# Altium PCB RADIOMASTER.PcbDoc
Units mm, origin at the board's own origin, x right, y up, seen from the top; angles counter-clockwise.
Board outline 22.82 x 52.44 mm, 2 copper layers (Top Layer, Bottom Layer); 23 components, 30 nets, 87 pads, 18 vias.
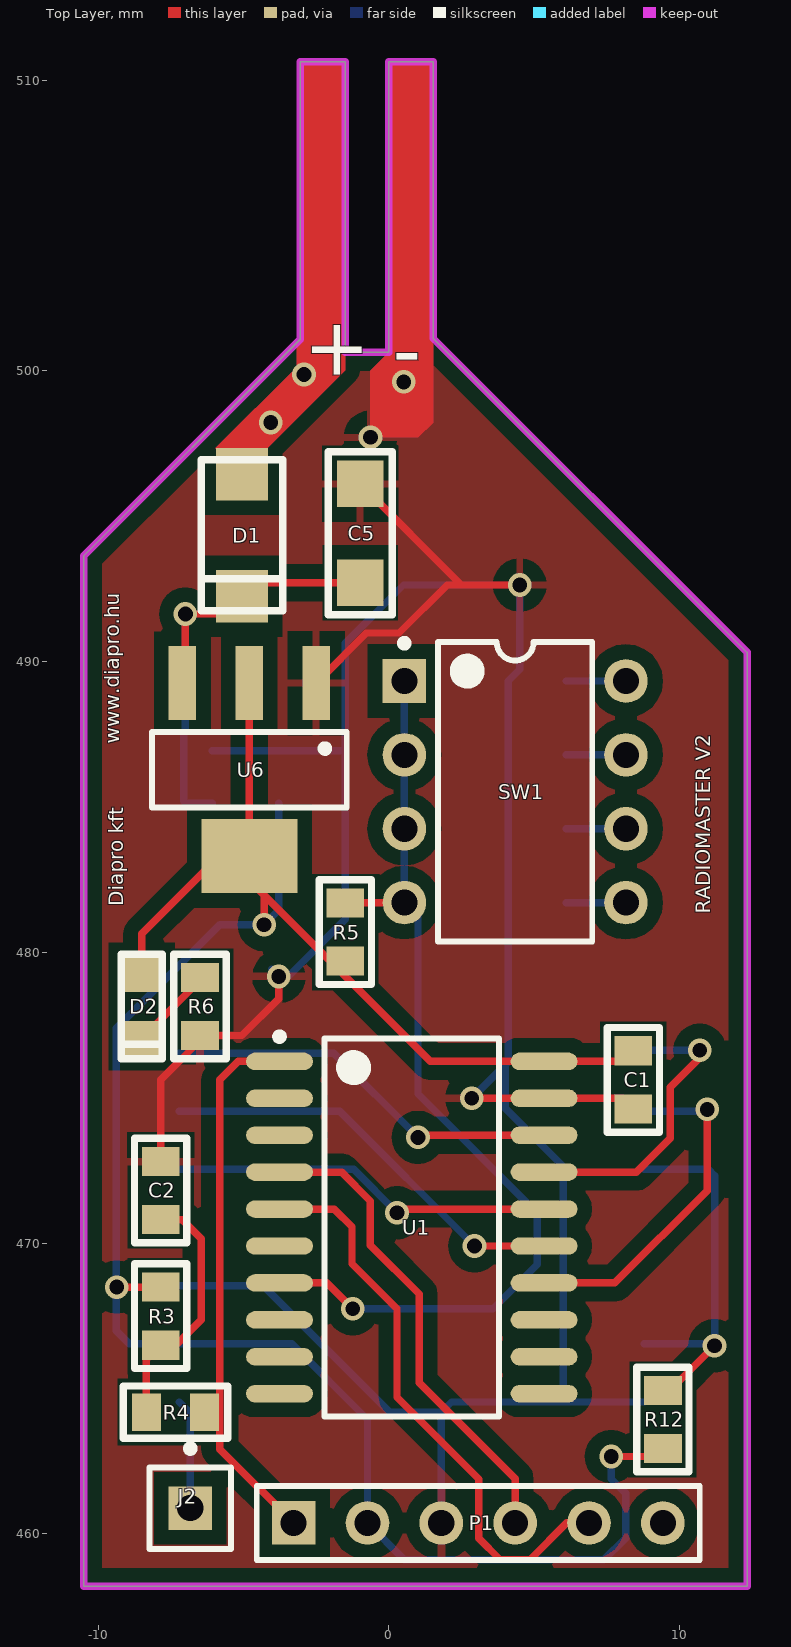
[diagram p0: Top Layer view]
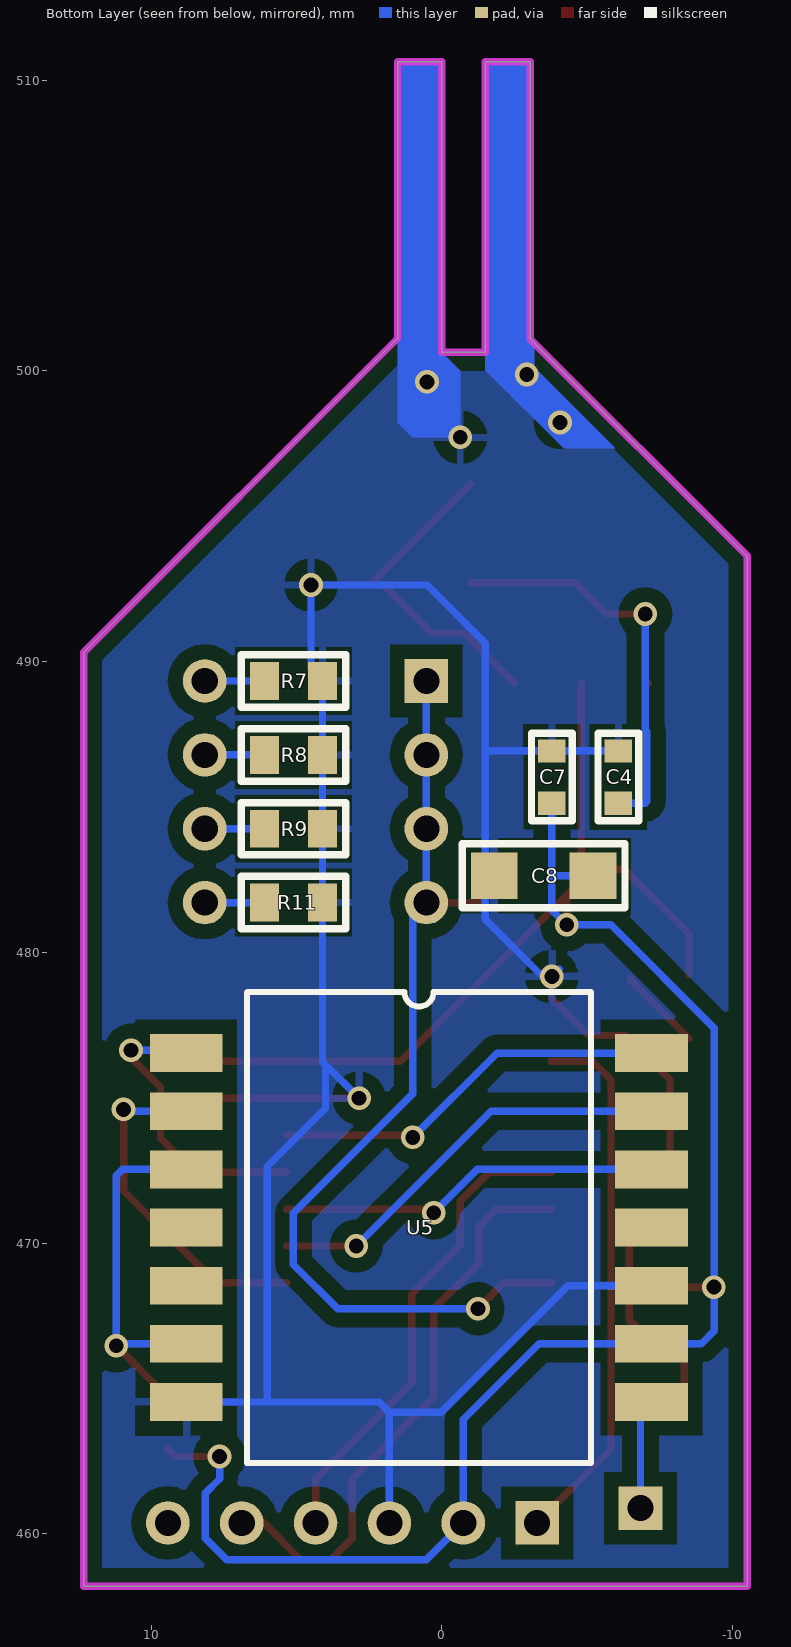
[diagram p1: Bottom Layer view, seen from below]
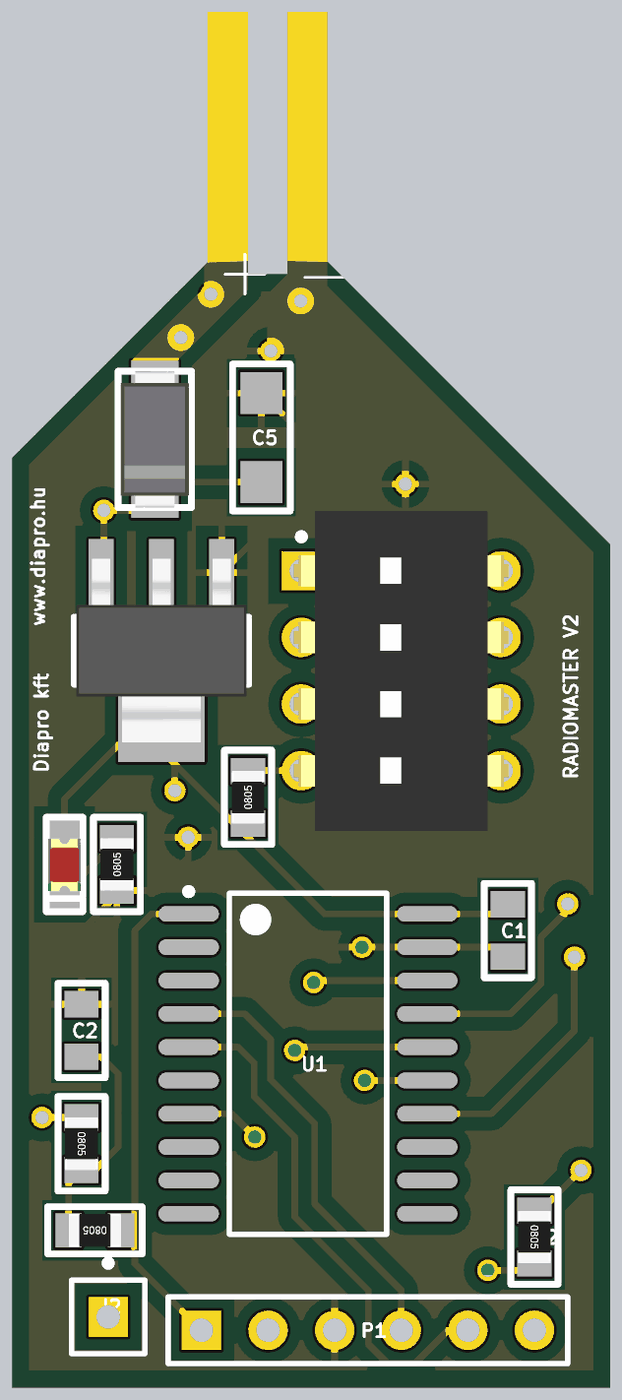
[diagram p2: 3D render of the assembled board from above, using the file's embedded part models]
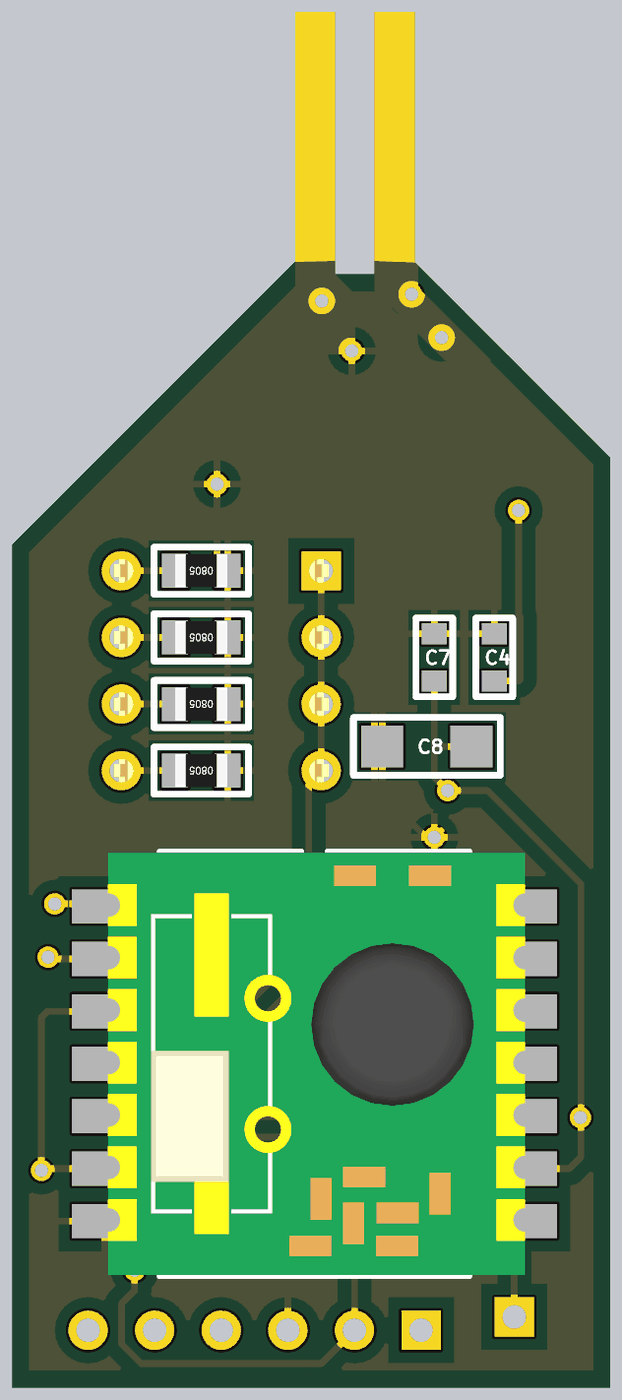
[diagram p3: 3D render of the assembled board from below, using the file's embedded part models]

## Layer stack, top to bottom
Top Layer: signal copper 0.0356
Dielectric: dielectric 0.32, FR-4, Dk 4.8
Bottom Layer: signal copper 0.0356

## Board outline
-10.5,458.192 -10.5,493.634 -3.048,501.086 -3.048,510.634 -1.5,510.634 -1.5,500.634 0,500.634 0,510.634 1.524,510.634 1.524,501.11 12.319,490.315 12.319,458.192

## Design rules (kind name [scope] priority, off if disabled: settings)
Clearance Clearance_to_polygon [All vs (InNamedPolygon('Bottom GND'))  or (InNamedPolygon('Top GND'))] p1: gap=0.508
Clearance [All] p2: gap=0.381
PolygonConnect [All] p1: connectstyle=Relief reliefconductorwidth=0.254 reliefentries=4 polygonreliefangle="90 Angle"
RoutingVias [All] p1: holewidth=0.508 width=0.813 viastyle="Through Hole" minholewidth=0.508 minwidth=0.813 maxholewidth=0.711 maxwidth=1.27
SilkToSilkClearance [All] p1: silktosilkclearance=0
SilkscreenOverComponentPads [All] p1: minsilkscreentomaskgap=0
SolderMaskExpansion [All] p1: expansion=0.102
Width [All] p1: maxlimit=1.524 minlimit=0.254 preferedwidth=0.254
26 further rules are at their usual default settings.

## Components (designator, comment, footprint, x,y, rotation, side; value= is the part's Value field where it differs from the comment)
C1 "100nF" FP_0805_CAP_060 8.406,475.614 r90 top
C2 "100nF" FP_0805_CAP_060 -7.85,471.804 r270 top
C4 "100nF" FP_0603_CAP_080 -6.072,486.028 r270 bottom
C5 "10uF" FP_1206_CAP_085 -0.992,494.41 r90 top
C7 "100nF" FP_0603_CAP_080 -3.786,486.028 r90 bottom
C8 "10uF" FP_1206_CAP_085 -3.5,482.634 r180 bottom
D1 "DIODE_big" "FP_SMA DO214AC" -5.056,496.442 r270 top
D2 "LED_RED" FP_0805_LED_RED -8.5,479.134 r270 top
J2 "ANT" PIN1 -6.834,460.882 r0 top
P1 "Header 6" HDR1X6 -3.278,460.374 r0 top
R3 "10K" FP_0805_RES -7.85,467.486 r270 top
R4 "100R" FP_0805_RES -7.342,464.184 r180 top
R5 "10k" FP_0805_RES -1.5,480.694 r90 top
R6 "270R" FP_0805_RES -6.5,478.134 r90 top
R7 "10k" FP_0805_RES 5.104,489.33 r0 bottom
R8 "10k" FP_0805_RES 5.104,486.79 r0 bottom
R9 "10k" FP_0805_RES 5.104,484.25 r0 bottom
R11 "10k" FP_0805_RES 5.104,481.71 r0 bottom
R12 "10k" FP_0805_RES 9.422,463.93 r270 top
SW1 "DIPSW4" "DIP switch 4 TH" 4.342,485.52 r0 top
U1 "PIC24F16KA101-I/SO" SOIC-SO20_N 0.786,470.534 r0 top
U5 "RFM12B" RFM12B-S1 0.786,470.534 r180 bottom
U6 "LD1117xx" SUPPLY_SOT223 -4.802,486.282 r270 top

## Footprints (in the part's own frame and the unit in brackets; to place one, negate y for a bottom-side part, rotate by r counter-clockwise, add the part's x,y. Pads: shape width x height; smd on the part's side, far side on the other; paste and mask are expansions set on the pad)
"DIP switch 4 TH" [mm]
  rect 1.5x1.5 hole 0.9: 1(-3.81,3.81)
  round 1.5 hole 0.9: 2(-3.81,1.27) 3(-3.81,-1.27) 4(-3.81,-3.81) 5(3.81,-3.81) 6(3.81,-1.27) 7(3.81,1.27) 8(3.81,3.81)
  silkscreen extent -3.93,-5.15 2.65,5.23, body extent -4.1,-6.1 4.1,6.1, height 5
FP_0603_CAP_080 [mm] "0.8mm magas 0603 kapacitás"
  rect 0.8x0.95 smd: 1(-0.9,0) 2(0.9,0)
  silkscreen extent -1.5,-0.7 1.5,0.7, body extent -0.8,-0.4 0.76,0.4, height 0.8
FP_0805_CAP_060 [mm] "0805 kapacitás YAGEO 0.6 mm magas"
  rect 1x1.3 smd: 1(-1,0) 2(1,0)
  silkscreen extent -1.8,-0.9 1.8,0.9, body extent -1,-0.64 1.03,0.64, height 0.6
FP_0805_LED_RED [mm] "0805 méretû piros LED"
  rect 1.2x1.3 smd: A(-0.1,0) K(2.1,0)
  silkscreen extent -0.8,-0.7 2.8,0.7, body extent 0.01,-0.63 2.03,0.62, height 1.1
FP_0805_RES [mm] "0805 ellenállás"
  rect 1x1.3 smd: 1(-1,0) 2(1,0)
  silkscreen extent -1.8,-0.9 1.8,0.9, body extent -1,-0.62 1,0.63, height 0.62
FP_1206_CAP_085 [mm] "1206 kapacitás 0.85 mm"
  rect 1.6x1.6 smd: 1(-1.7,0) 2(1.7,0)
  silkscreen extent -2.8,-1.1 2.8,1.1, body extent -1.52,-0.79 1.58,0.79, height 0.85
"FP_SMA DO214AC" [mm] "SMA DO-214AC tok"
  rect 1.8x1.8 smd: A(0,0) K(4.2,0)
  silkscreen extent -0.5,-1.4 4.7,1.4, body extent -0.5,-1.3 4.7,1.3, height 2.42
HDR1X6 [mm] "Connector; Header; 6 Position"
  rect 1.5x1.5 hole 0.9: 1(0,0)
  round 1.5 hole 0.9: 2(2.54,0) 3(5.08,0) 4(7.62,0) 5(10.16,0) 6(12.7,0)
  silkscreen extent -1.27,-1.27 13.97,1.27
PIN1 [mm] "Connector; Plug"
  rect 1.5x1.5 hole 0.9: 1(0,0)
  silkscreen extent -1.4,-1.4 1.4,2.17
RFM12B-S1 [mm]
  rect 2.5x1.3 smd: 1(-8,6) 2(-8,4) 3(-8,2) 4(-8,0) 5(-8,-2) 6(-8,-4) 7(-8,-6) 8(8,-6) 9(8,-4) 10(8,-2) 11(8,0) 12(8,2) 13(8,4) 14(8,6)
  silkscreen extent -5.91,-8.1 5.92,8.1, body extent -7.88,-8.05 8.04,8.05, height 2.1
SOIC-SO20_N [mm] "SOIC, 20-Leads, Body 12.8x7.5mm, Pitch 1.27mm, IPC Medium Density"
  oval 2.3x0.6 smd: 1(-4.55,5.715) 2(-4.55,4.445) 3(-4.55,3.175) 4(-4.55,1.905) 5(-4.55,0.635) 6(-4.55,-0.635) 7(-4.55,-1.905) 8(-4.55,-3.175) 9(-4.55,-4.445) 10(-4.55,-5.715) 11(4.55,-5.715) 12(4.55,-4.445) 13(4.55,-3.175) 14(4.55,-1.905) 15(4.55,-0.635) 16(4.55,0.635) 17(4.55,1.905) 18(4.55,3.175) 19(4.55,4.445) 20(4.55,5.715)
  silkscreen extent -4.67,-6.5 3,6.69, body extent -3.75,-6.5 3.75,6.5, height 2.65
SUPPLY_SOT223 [mm] "SOT223 package, 3 leads"
  rect 2.55x0.95 smd: 1(-2.975,2.3) 2(-2.975,0) 3(-2.975,-2.3)
  rect 2.55x3.3 smd: 2(2.975,0)
  silkscreen extent -1.3,-3.35 1.3,3.35, body extent -3.5,-3.25 3.5,3.25, height 1.65

## Part data
C1 C2 C4 C5 C7 C8: library part Cap, "Capacitor"
D2: library part LED_R, "Typical LED"
J2: library part Socket, "Socket"
P1: "Header, 6-Pin"
R3 R4 R5 R6 R7 R8 R9 R11 R12: library part Res3, "Resistor"
U1: "16-Bit Flash Microcontroller with nanoWatt XLP Technology, 16KB Flash, 1.5KB SRAM, 20-Pin SOIC, Industrial Temperature"
U5: "FM Module"
U6: "LD1117xx 3,3V lin reg"

## Via types
v1: diameter 0.813, hole 0.508, Top Layer to Bottom Layer, 18 vias

## Nets (pads, with @x,y where several pads share a name; then routed paths per layer and width w, separated by ;. In a path a pad name is that pad's centre, name@x,y a point inside that pad or via, vN(x,y) a via of type N, cw(c..) or ccw(c..) an arc to the next point about the centre after c; other vN are vias at no path point)
+++: D1.A
  other v1: -4.064,498.221 -2.921,499.872
---: C1.1 C2.1 C4.1 C5.2 C7.2 C8.1 P1.3 R6.1 R7.1 R8.1 R9.1 R11.1 U1.19 U5.7 U5.10 U6.1 | length 106.7
  Top Layer w0.254: C2.1 -7.85,475.614 -6.326,477.138 -5.056,477.138 -3.786,478.408 v1(-3.786,479.17) ; U6.1 -0.777,490.982 0.348,490.982 2,492.634 v1(4.5,492.634) 2.484,492.634 C5.2 ; v1(2.845,474.979) U1.19 8.041,474.979 C1.1
  Bottom Layer w0.254: U5.10 -4.326,468.534 0.024,464.184 1.802,464.184 ; C4.1 C7.2 -1.5,486.928 ; v1@-4.04,479.424 v1(-3.786,479.17) -3.464,479.17 -1.5,481.134 -1.5,490.634 0.5,492.634 v1(4.5,492.634) 4.5,489.726 R7.1 R8.1 R9.1 R11.1 4.104,476.238 4,476.134 ; P1.3 1.802,464.184 ; v1(2.845,474.979) 4,476.134 ; U5.7 6,464.534 ; 1.802,464.184 2.152,464.534 6,464.534 ; 4,476.134 4,474.634 6,472.634 6,464.534
  other v1: -0.635,497.713 0.508,499.618
AN0: U1.2
AN1: U1.3
AN2: R5.2 SW1.1 SW1.2 SW1.3 SW1.4 U1.7 | length 33.8
  Top Layer w0.254: U1.7 -2.135,468.629 v1(-1.246,467.74) ; R5.2@-1.484,481.71 SW1.4
  Bottom Layer w0.254: v1(-1.246,467.74) 3.58,467.74 5.104,469.264 5.104,471.03 1,475.134 1,481.242 SW1.4 SW1.3 SW1.2 SW1.1
AN2/PGD1: P1.4 U1.4 | length 16.7
  Top Layer w0.254: U1.4 -1.627,472.439 -0.636,471.448 -0.636,469.924 1.04,468.248 1.04,465.2 4.342,461.898 P1.4
GPIO0: U1.11
GPIO1: U1.9
GPIO2: U1.10
GPIO3: U1.6
GPIO4/PGC1: P1.5 U1.5 | length 19.9
  Top Layer w0.254: U1.5 -1.881,471.169 -1.271,470.559 -1.271,469.289 0.278,467.74 0.278,464.692 3.084,461.886 3.084,459.853 3.821,459.116 4.863,459.116 6.121,460.374 P1.5
GPIO5: U1.8
M\C\L\R\: P1.1 R4.1 U1.1 | length 18.6
  Top Layer w0.254: U1.1 -5.183,476.249 -5.818,475.614 -5.818,462.914 P1.1
MISO: U1.17 U5.1 | length 10.2
  Top Layer w0.254: U1.17 8.508,472.439 9.676,473.607 9.676,475.36 10.692,476.376 v1(10.692,476.63)
  Bottom Layer w0.254: U5.1 8.882,476.63 v1(10.692,476.63)
MOSI: U1.16 U5.12 | length 13.2
  Top Layer w0.254: v1(0.278,471.042) 0.405,471.169 U1.16
  Bottom Layer w0.254: U5.12 -1.214,472.534 v1(0.278,471.042)
NetC2_2: C2.2 R3.2 R4.2 | length 8.7
  Top Layer w0.254: R4.2 -8.342,465.994 R3.2 -7.326,466.486 -6.453,467.359 -6.453,470.153 -7.104,470.804 C2.2
NetD2_K: D2.K R6.2 | length 2.9
  Top Layer w0.254: D2.K -6.5,479.034 R6.2
NetJ2_1: J2.1 U5.8 | length 3.8
  Bottom Layer w0.254: U5.8 -6.834,464.154 J2.1
NetR7_2: R7.2 SW1.8 | length 2
  Bottom Layer w0.254: R7.2 SW1.8
NetR8_2: R8.2 SW1.7 | length 2
  Bottom Layer w0.254: R8.2 SW1.7
NetR9_2: R9.2 SW1.6 | length 2
  Bottom Layer w0.254: R9.2 SW1.6
NetR11_2: R11.2 SW1.5 | length 2
  Bottom Layer w0.254: R11.2 SW1.5
NetR12_1: R12.1 U5.3 U5.6 | length 13.2
  Top Layer w0.254: R12.1 9.66,464.93 v1(11.2,466.47)
  Bottom Layer w0.254: U5.6 11.136,466.534 v1(11.2,466.47) 11.2,472.312 10.978,472.534 U5.3
"RF I\R\Q\": U1.14 U5.2 | length 11.9
  Top Layer w0.254: U1.14 7.771,468.629 10.946,471.804 v1(10.946,474.598)
  Bottom Layer w0.254: U5.2 10.882,474.534 v1(10.946,474.598)
"RF S\S\": U1.18 U5.14 | length 13.8
  Top Layer w0.254: v1(1,473.634) 1.075,473.709 U1.18
  Bottom Layer w0.254: U5.14 -1.9,476.534 v1(1,473.634)
SCK: U1.15 U5.13 | length 14.5
  Top Layer w0.254: v1(2.945,469.899) U1.15
  Bottom Layer w0.254: U5.13 -1.69,474.534 v1(2.945,469.899)
SCL: U1.12
SDA: U1.13
VCC3.3V: C1.2 C7.1 C8.2 D2.A P1.2 R3.1 R5.1 R12.2 U1.20 U5.9 U6.2 | length 82.5
  Top Layer w0.254: v1(-9.358,468.486) R3.1 R3.1@-7.596,468.486 ; D2.A -8.5,480.634 -6.28,482.854 U6.2@-5.842,482.854 ; U6.2@-4.802,482.472 U6.2@-4.802,483.307 ; U6.2@-4.802,489.257 U6.2@-4.802,483.307 ; v1(-4.294,480.948) -4.294,481.964 ; v1(7.644,462.66) 9.152,462.66 R12.2 ; C1.2 8.041,476.249 U1.20 1.421,476.249 -5.219,482.889 U6.2@-4.802,483.307
  Bottom Layer w0.254: C8.2 -3.786,482.634 ; C7.1 -3.786,482.634 ; v1(7.644,462.66) 7.644,461.887 8.14,461.391 8.14,459.853 7.391,459.104 0.532,459.104 P1.2 -0.738,463.93 -3.342,466.534 U5.9 -8.93,466.534 -9.374,466.978 -9.374,477.392 -5.818,480.948 v1(-4.294,480.948) -3.786,481.456 -3.786,482.634
VCC_13V: C4.2 C5.1 D1.K U6.3 | length 16.3
  Top Layer w0.254: U6.3 -7,489.359 v1(-7,491.634) -5.664,491.634 D1.K -4.588,492.71 C5.1
  Bottom Layer w0.254: v1(-7,491.634) -7,487.648 -7.055,487.593 -7.055,485.189 -6.994,485.128 C4.2
pads on no net: P1.6 U5.4 U5.5 U5.11

## Polygon pours and split planes (outlines as drawn)
--- on Top Layer "Top GND" (solid, pour order 4): -10.5,458.216 12.319,458.216 12.319,490.315 2.076,500.558 2,500.634 -3.5,500.634 -10.485,493.649
--- on Bottom Layer "Bottom GND" (solid, pour order 6): -10.287,458.192 -10.263,458.216 12.319,458.216 12.319,490.315 2.076,500.558 2,500.634 -3.5,500.634 -10.485,493.649

## Keep-outs
Keep-Out Layer:
  the board outline again, w0.254

## Other copper
Top Layer:
  region net +++: -5.969,497.332 -3.175,500.126 -3.175,500.959 -3.048,501.086 -3.048,510.634 -1.5,510.634 -1.5,500.023 -4.191,497.332
  region net ---: 0,500.634 0,510.634 1.524,510.634 1.524,498.221 1.016,497.713 -0.635,497.713 -0.635,499.999
Bottom Layer:
  region net +++: -5.969,497.332 -3.175,500.126 -3.175,500.959 -3.048,501.086 -3.048,510.634 -1.5,510.634 -1.5,500.023 -4.191,497.332
  region net ---: 0,500.634 0,510.634 1.524,510.634 1.524,498.221 1.016,497.713 -0.635,497.713 -0.635,499.999

## Silkscreen, mask and mechanical layers (free items; w line width, h text height)
Top Overlay:
  text "+" at -2.921,499.872 h2
  text "-" at 0.127,499.745 h2
  text "www.diapro.hu" at -9.271,487.172 h0.5 r90
  text "Diapro kft" at -9.144,481.584 h0.5 r90
  text "RADIOMASTER V2" at 11.049,481.33 h0.5 r90
Top Solder:
  region: -3.048,501.086 -3.048,510.634 -1.5,510.634 -1.5,501.142
  region: 1.524,501.11 1.524,510.634 0,510.634 0,501.142
Bottom Solder:
  region: -3.048,501.086 -3.048,510.634 -1.5,510.634 -1.5,501.142
  region: 1.524,501.11 1.524,510.634 0,510.634 0,501.142